# Altium PCB MSP430_Board.PcbDoc
Units mil, origin at the board's own origin, x right, y up, seen from the top; angles counter-clockwise.
Board outline 8230 x 4250 mil, 2 copper layers (Top Layer, Bottom Layer); 50 components, 122 nets, 371 pads, 42 vias.
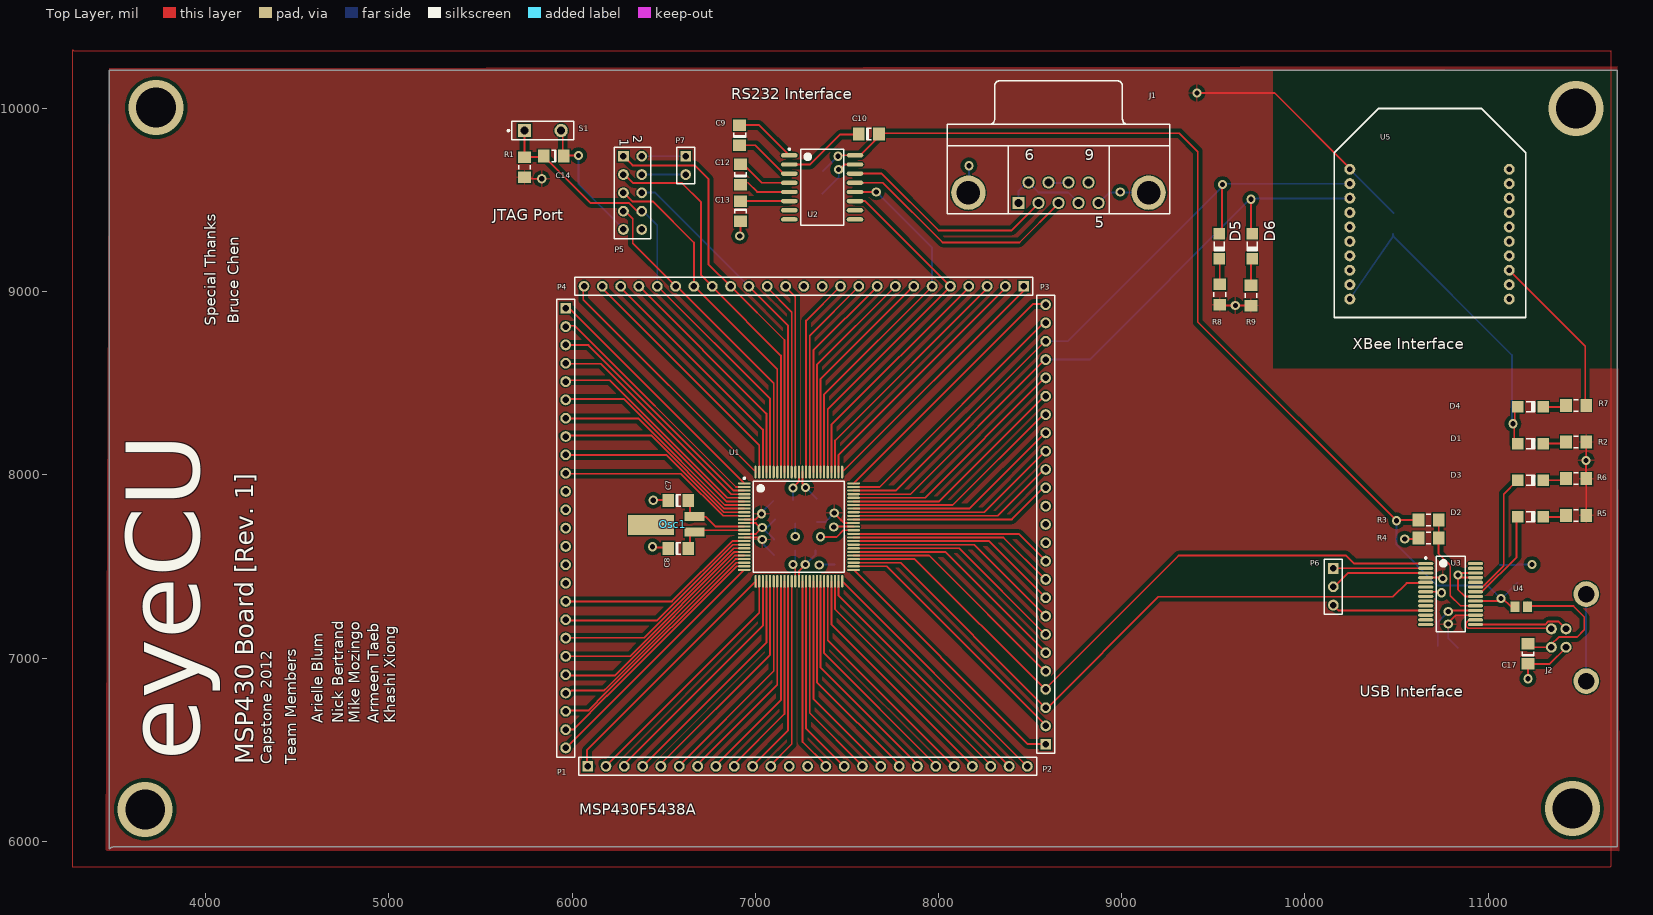
[diagram p0: Top Layer view]
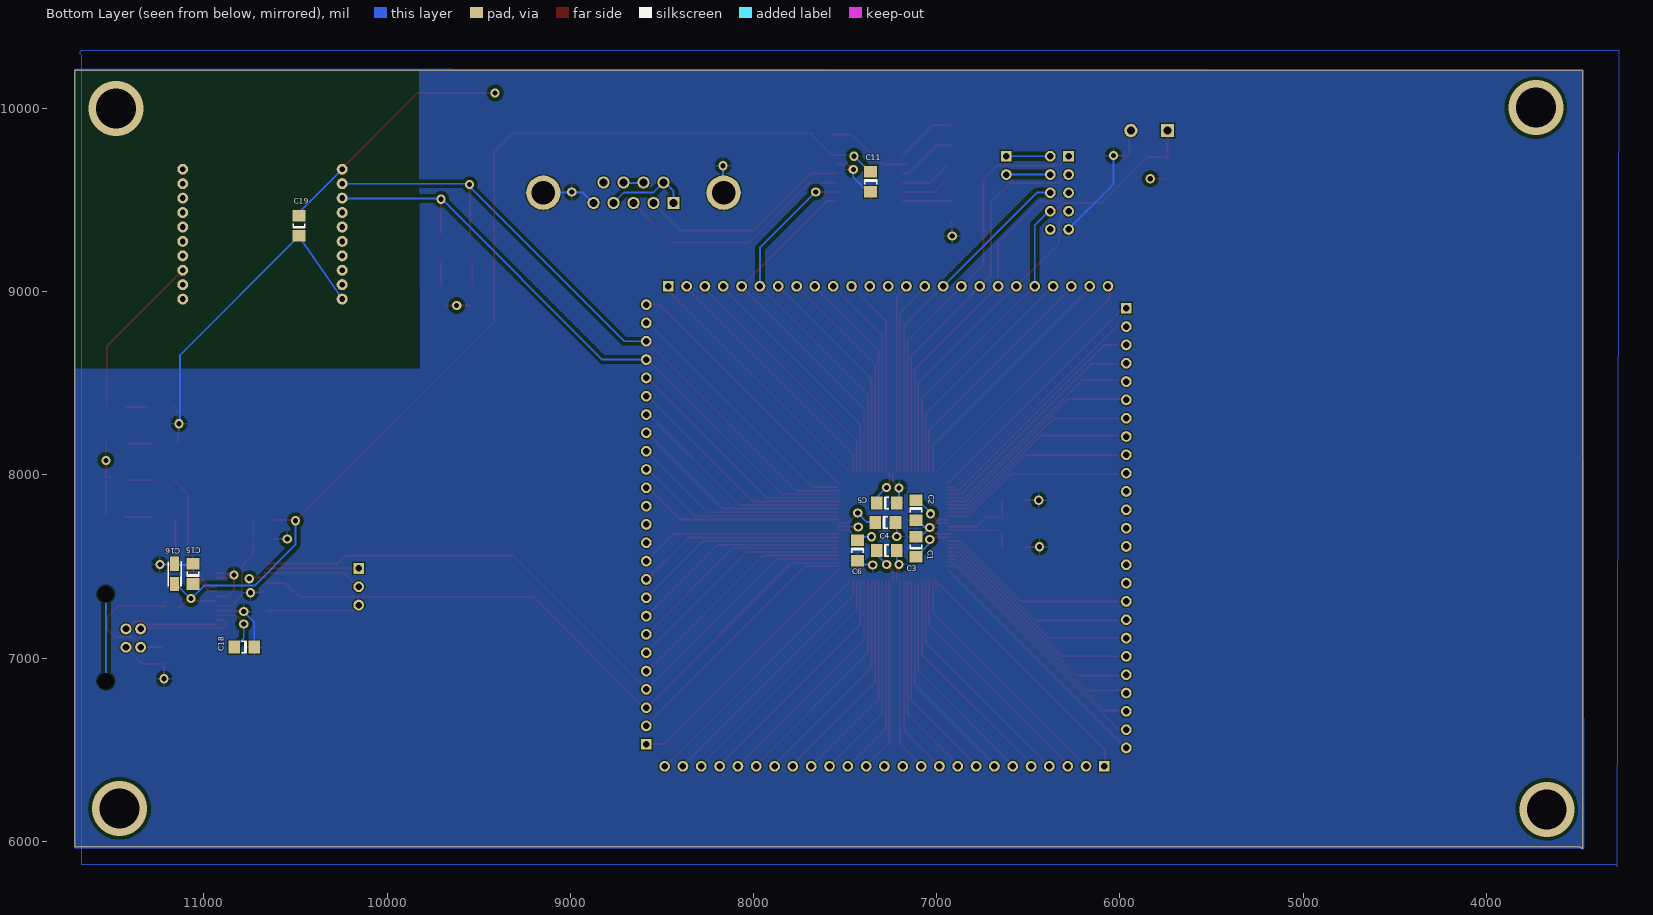
[diagram p1: Bottom Layer view, seen from below]

## Layer stack, top to bottom
Top Layer: signal copper 1.4
Dielectric: dielectric 12.6, FR-4, Dk 4.8
Bottom Layer: signal copper 1.4

## Board outline
3475,10210 11705,10210 11705,5970 3499.14,5970 ccw(c3499.14,5935.86) 3475,5960 3475,10200

## Design rules (kind name [scope] priority, off if disabled: settings)
Clearance Polygon_Clearance [InPolygon vs IsTrack OR IsVia] p1: gap=20 // clearance from other pours to connectors
Clearance [All] p2: gap=6
DiffPairsRouting [All] p1: maxlimit=10 minlimit=10 mostfreqgap=10 maxuncoupledlength=500
HoleSize [All] p1: absolutevalues=TRUE maxlimit=300 minlimit=15 maxpercent=80.000 minpercent=20.000
MinimumAnnularRing [All] p1: minimumring=7
MinimumSolderMaskSliver [All] p1: minsoldermaskwidth=6
PolygonConnect [All] p1: connectstyle=Relief reliefconductorwidth=10 reliefentries=4 polygonreliefangle="90 Angle"
RoutingVias [All] p1: holewidth=28 width=50 viastyle="Through Hole" minholewidth=28 minwidth=50 maxholewidth=28 maxwidth=50
SilkscreenOverComponentPads [All] p1: minsilkscreentomaskgap=6
SolderMaskExpansion [All] p1: expansion=4
Width [All] p1: maxlimit=10 minlimit=6 preferedwidth=10 bottomlayer_minwidth=10 minimp=50.000000 maximp=50.000000 favimp=50.000000
24 further rules are at their usual default settings.

## Classes and differential pairs
net class U5_Nets: MSP_AVCC MSP_AVSS MSP_P9.4/UCA2TXD MSP_P9.5/UCA2RXD NetR7_2 NetU5_4 NetU5_5 NetU5_6 NetU5_7 NetU5_8 NetU5_9 NetU5_11 NetU5_12 NetU5_14 NetU5_15 NetU5_16 NetU5_17 NetU5_18 NetU5_19 NetU5_20
net class J2_Nets: MSP_AVSS NetC17_2 USB_SHIELD USBD_N USBD_P
net class U3_Nets: C\T\S\ D\T\R\ MSP_AVCC MSP_AVSS MSP_P5.6/UCA1TXD MSP_P5.7/UCA1RXD R\E\S\E\T\ R\T\S\ USB_RX USB_TX USBD_N USBD_P VCC5V
net class R9_Nets: MSP_AVCC NetD6_1
net class R8_Nets: MSP_AVCC NetD5_1
net class R6_Nets: MSP_AVCC NetD3_1
net class R5_Nets: MSP_AVCC NetD2_1
net class R2_Nets: MSP_AVCC NetD1_1
net class R1_Nets: MSP_AVCC MSP_R\S\T\
net class C19_Nets: MSP_AVCC MSP_AVSS
net class C18_Nets: MSP_AVCC MSP_AVSS
net class C5_Nets: MSP_AVCC MSP_AVSS
net class C4_Nets: MSP_AVCC MSP_AVSS
net class C3_Nets: MSP_AVCC MSP_AVSS
net class C2_Nets: MSP_AVCC MSP_AVSS
net class C1_Nets: MSP_AVCC MSP_AVSS
net class P7_Nets: VCCTARGET VCCTOOL
net class R7_Nets: NetD4_1 NetR7_2
component class Serial_and_JTAG: C9 C10 C11 C12 C13 C14 J1 P5 P7 R1 S1 U2
component class Sheet1: C1 C2 C3 C4 C5 C6 C7 C8 Osc1 P1 P2 P3 P4 U1
component class "USB Interface": C15 C16 C17 C18 D1 D2 D3 J2 LED1 LED2 LED3 P6 R2 R3 R4 R5 R6 U3 U4
component class XBee: C19 D4 D5 D6 LED4 LED5 LED6 R7 R8 R9 U5
net class C6_Nets: MSP_AVSS MSP_VCORE
net class C11_Nets: MSP_AVSS VCC5V
net class C14_Nets: MSP_AVSS MSP_R\S\T\
net class C16_Nets: MSP_AVSS VCC5V
net class C15_Nets: MSP_AVSS VCC5V
net class J1_Nets: MSP_AVSS NetJ1_1 NetJ1_7 NetJ1_9 RS232_RX RS232_TX
net class P1_Nets: MSP_P1.0//TA0CLK/ACLK MSP_P1.1/TA0.0 MSP_P1.2/TA0.1 MSP_P1.3/TA0.2 MSP_P1.4/TA0.3 MSP_P1.5/TA0.4 MSP_P1.6/SMCLK MSP_P1.7 MSP_P2.0/TA1CLK MSP_P5.0/VREF+ MSP_P5.1/VREF- MSP_P6.4/A4 MSP_P6.5/A5 MSP_P6.6/A6 MSP_P6.7/A7 MSP_P7.4/A12 MSP_P7.5/A13 MSP_P7.6/A14 MSP_P7.7/A15
net class P2_Nets: MSP_P2.1/TA1.0 MSP_P2.2/TA1.1 MSP_P2.3/TA1.2 MSP_P2.4/RTCCLK MSP_P2.5 MSP_P2.6/ACLK MSP_P2.7/DMAE0 MSP_P3.0/UCA0CLK MSP_P3.1/UCB0SDA MSP_P3.2/UCB0SCL MSP_P3.3/UCA0STE MSP_P3.4/UCA0TXD MSP_P3.5/UCA0RXD MSP_P3.6/UCA1CLK MSP_P3.7/UCB1SDA MSP_P4.0/TB0.0 MSP_P4.1/TB0.1 MSP_P4.2/TB0.2 MSP_P4.3/TB0.3 MSP_P4.4/TB0.4 MSP_P4.5/TB0.5 MSP_P4.6/TB0.6 MSP_P4.7/TB0CLK/SMCLK
net class P3_Nets: MSP_P5.4/UCB1SCL MSP_P5.5/UCB1CLK MSP_P5.6/UCA1TXD MSP_P5.7/UCA1RXD MSP_P7.2 MSP_P7.3/TA1.2 MSP_P8.0/TA0.0 MSP_P8.1/TA0.1 MSP_P8.2/TA0.2 MSP_P8.3/TA0.3 MSP_P8.4/TA0.4 MSP_P8.5/TA1.0 MSP_P8.6/TA1.1 MSP_P8.7 MSP_P9.0 MSP_P9.1 MSP_P9.2 MSP_P9.3 MSP_P9.4/UCA2TXD MSP_P9.5/UCA2RXD MSP_P9.6 MSP_P9.7
net class P4_Nets: MSP_P5.2/XT2IN MSP_P5.3/XT2OUT MSP_P6.0/A0 MSP_P6.1/A1 MSP_P6.2/A2 MSP_P6.3/A3 MSP_P10.0 MSP_P10.1 MSP_P10.2 MSP_P10.3 MSP_P10.4/UCA3TXD MSP_P10.5/UCA3RXD MSP_P10.6 MSP_P10.7 MSP_P11.0/ACLK MSP_P11.1/MCLK MSP_P11.2/SMCLK MSP_PJ.0/TDO MSP_PJ.1/TDI/TCLK MSP_PJ.2/TMS MSP_PJ.3/TCK MSP_R\S\T\ MSP_TEST
net class P5_Nets: MSP_AVSS MSP_PJ.0/TDO MSP_PJ.1/TDI/TCLK MSP_PJ.2/TMS MSP_PJ.3/TCK MSP_R\S\T\ MSP_TEST NetP6_10 VCCTARGET VCCTOOL
net class U1_Nets: MSP_AVCC MSP_AVSS MSP_P1.0//TA0CLK/ACLK MSP_P1.1/TA0.0 MSP_P1.2/TA0.1 MSP_P1.3/TA0.2 MSP_P1.4/TA0.3 MSP_P1.5/TA0.4 MSP_P1.6/SMCLK MSP_P1.7 MSP_P2.0/TA1CLK MSP_P2.1/TA1.0 MSP_P2.2/TA1.1 MSP_P2.3/TA1.2 MSP_P2.4/RTCCLK MSP_P2.5 MSP_P2.6/ACLK MSP_P2.7/DMAE0 MSP_P3.0/UCA0CLK MSP_P3.1/UCB0SDA MSP_P3.2/UCB0SCL MSP_P3.3/UCA0STE MSP_P3.4/UCA0TXD MSP_P3.5/UCA0RXD MSP_P3.6/UCA1CLK MSP_P3.7/UCB1SDA MSP_P4.0/TB0.0 MSP_P4.1/TB0.1 MSP_P4.2/TB0.2 MSP_P4.3/TB0.3 MSP_P4.4/TB0.4 MSP_P4.5/TB0.5 MSP_P4.6/TB0.6 MSP_P4.7/TB0CLK/SMCLK MSP_P5.0/VREF+ MSP_P5.1/VREF- MSP_P5.2/XT2IN MSP_P5.3/XT2OUT MSP_P5.4/UCB1SCL MSP_P5.5/UCB1CLK MSP_P5.6/UCA1TXD MSP_P5.7/UCA1RXD MSP_P6.0/A0 MSP_P6.1/A1 MSP_P6.2/A2 MSP_P6.3/A3 MSP_P6.4/A4 MSP_P6.5/A5 MSP_P6.6/A6 MSP_P6.7/A7 MSP_P7.0/XIN MSP_P7.1/XOUT MSP_P7.2 MSP_P7.3/TA1.2 MSP_P7.4/A12 MSP_P7.5/A13 MSP_P7.6/A14 MSP_P7.7/A15 MSP_P8.0/TA0.0 MSP_P8.1/TA0.1 MSP_P8.2/TA0.2 MSP_P8.3/TA0.3 MSP_P8.4/TA0.4 MSP_P8.5/TA1.0 MSP_P8.6/TA1.1 MSP_P8.7 MSP_P9.0 MSP_P9.1 MSP_P9.2 MSP_P9.3 MSP_P9.4/UCA2TXD MSP_P9.5/UCA2RXD MSP_P9.6 MSP_P9.7 MSP_P10.0 MSP_P10.1 MSP_P10.2 MSP_P10.3 MSP_P10.4/UCA3TXD MSP_P10.5/UCA3RXD MSP_P10.6 MSP_P10.7 MSP_P11.0/ACLK MSP_P11.1/MCLK MSP_P11.2/SMCLK MSP_PJ.0/TDO MSP_PJ.1/TDI/TCLK MSP_PJ.2/TMS MSP_PJ.3/TCK MSP_R\S\T\ MSP_TEST MSP_VCORE NetU1_39 NetU1_40 NetU1_53 NetU1_54 NetU1_57 NetU1_58 NetU1_59 NetU1_60 NetU1_61 NetU1_62 NetU1_65 NetU1_66 NetU1_67 NetU1_68 NetU1_69 NetU1_70 NetU1_71 NetU1_72 NetU1_73 NetU1_74 NetU1_75 NetU1_76 NetU1_77 NetU1_78 NetU1_79 NetU1_80 NetU1_81 NetU1_82 NetU1_83 NetU1_84 NetU1_85 NetU1_86 NetU1_89 NetU1_90 NetU1_91 NetU1_92 NetU1_93 NetU1_94 NetU1_95 NetU1_96
net class U2_Nets: MSP_AVSS MSP_P10.4/UCA3TXD MSP_P10.5/UCA3RXD NetC9_1 NetC9_2 NetC10_1 NetC12_1 NetC12_2 NetC13_1 NetU2_7 NetU2_8 NetU2_9 NetU2_10 RS232_RX RS232_TX VCC5V
net class U4_Nets: NetC17_2 VCC5V
net class P6_Nets: C\T\S\ D\T\R\ R\T\S\
net class R3_Nets: R\E\S\E\T\ VCC5V
net class R4_Nets: MSP_AVSS R\E\S\E\T\
net class C7_Nets: MSP_AVSS MSP_P7.0/XIN
net class C8_Nets: MSP_AVSS MSP_P7.1/XOUT
net class S1_Nets: MSP_AVSS MSP_R\S\T\
net class Osc1_Nets: MSP_P7.0/XIN MSP_P7.1/XOUT
net class C9_Nets: NetC9_1 NetC9_2
net class C12_Nets: NetC12_1 NetC12_2
net class C13_Nets: MSP_AVSS NetC13_1
net class C17_Nets: MSP_AVSS NetC17_2
net class C10_Nets: NetC10_1 VCC5V
net class D6_Nets: MSP_P9.4/UCA2TXD NetD6_1
net class D5_Nets: MSP_P9.5/UCA2RXD NetD5_1
net class D4_Nets: MSP_AVSS NetD4_1
net class D3_Nets: NetD3_1 USB_TX
net class D2_Nets: NetD2_1 USB_RX
net class D1_Nets: MSP_AVSS NetD1_1
differential pair USBD: +USBD_P -USBD_N

## Components (designator, comment, footprint, x,y, rotation, side; value= is the part's Value field where it differs from the comment)
C1 "C1206" 1206 7113,7808 r270 bottom
C2 "C1206" 1206 7113,7608 r90 bottom
C3 "C1206" 1206 7273,7588 r180 bottom
C4 "C1206" 1206 7280,7740 r180 bottom
C5 "C1206" 1206 7273,7848 r180 bottom
C6 "C1206" 1206 7433,7588 r270 bottom
C7 "C1206" 1206 6580,7860 r0 top
C8 "C1206" 1206 6580,7600 r0 top
C9 "C1206" 1206 6915,9855 r90 top
C10 "C1206" 1206 7620,9860 r0 top
C11 "C1206" 1206 7360,9600 r270 bottom
C12 "C1206" 1206 6920,9640 r90 top
C13 "C1206" 1206 6920,9440 r270 top
C14 "C1206" 1206 5900,9740 r180 top
C15 "C1206" 1206 11060,7460 r90 bottom
C16 "T494A" A 11160,7460 r90 bottom
C17 "C1206" 1206 11217,7024 r90 top
C18 "C1206" 1206 10780,7060 r0 bottom
C19 "C1206" 1206 10480,9360 r90 bottom
D1 "LED2" LED_LiteOn_footprint 11300,8140 r180 top
D2 "LED2" LED_LiteOn_footprint 11300,7740 r180 top
D3 "LED2" LED_LiteOn_footprint 11300,7940 r180 top
D4 "LED2" LED_LiteOn_footprint 11300,8340 r180 top
D5 "LED2" LED_LiteOn_footprint 9500,9180 r90 top
D6 "LED2" LED_LiteOn_footprint 9680,9180 r90 top
J1 "D Connector 9" DSUB1.385-2H9 8655,9915 r0 top
J2 "USBB" PCBComponent_1#1 11535,7350 r90 top
Osc1 "crystal" PCBCOMPONENT_1 6608,7659 r0 top
P1 "Header 25" HDR1X25 5965,8910 r270 top
P2 "Header 25" HDR1X25 6085,6410 r0 top
P3 "Header 25" HDR1X25 8585,6530 r90 top
P4 "Header 25" HDR1X25 8465,9030 r180 top
P5 "JTAG" HDR2X5 6280,9740 r270 top
P6 "Header 3" HDR1X3 10155,7490 r270 top
P7 "Header 2" HDR1X2 6620,9740 r270 top
R1 "47K" 8-1206 5740,9680 r270 top
R2 "100" 8-1206 11480,8180 r0 top
R3 "4.7K" 8-1206 10675,7755 r0 top
R4 "10K" 8-1206 10675,7655 r180 top
R5 "100" 8-1206 11480,7780 r180 top
R6 "100" 8-1206 11480,7980 r180 top
R7 "100" 8-1206 11480,8380 r0 top
R8 "100" 8-1206 9535,8985 r90 top
R9 "100" 8-1206 9705,8980 r90 top
S1 "SW-PB" SPST-2 5840,9880 r0 top
U1 "MSP430" TSQFP50P1600X1600X160-100N 7238,7718 r0 top
U2 "MAX232CWE" WSO16_N 7365,9570 r0 top
U3 "FT232RL" SOP65P780X200-28N 10795,7350 r0 top
U4 "MI0805K400R-10" INDC2012X11N 11180,7280 r180 top
U5 "XBee" PCBComponent_1#2 10245,8960 r0 top

## Footprints (in the part's own frame and the unit in brackets; to place one, negate y for a bottom-side part, rotate by r counter-clockwise, add the part's x,y. Pads: shape width x height; smd on the part's side, far side on the other; paste and mask are expansions set on the pad)
8-1206 [mm] "Chip Resistor; Body 3.1 x 1.6 mm (LxW typ)"
  rect 1.6x1.8 smd: 1(-1.4,0) 2(1.4,0)
  silkscreen extent -0.3,-0.8 0.3,0.8
1206 [mm] "Chip Capacitor; Body 3.2 x 1.6 mm (LxW typ)"
  rect 1.6x1.8 smd: 1(-1.4,0) 2(1.4,0)
  silkscreen extent -0.3,-0.8 0.3,0.8
A [mm] "Capacitor, SM Tantalum; Body 3.2 x 1.6 mm (LxW typ)"
  rect 2x1.2 smd: 1(-1.4,0) 2(1.4,0)
  silkscreen extent -1.7,-0.9 1.7,0.9
DSUB1.385-2H9 [mm] "Connector; D Subminiature; 9 Position; Right Angle; Pitch 1.385 mm"
  rect 1.69x1.69 hole 1.09: 1(-5.54,-10.92)
  round 1.69 hole 1.09: 2(-2.77,-10.92) 3(0,-10.92) 4(2.77,-10.92) 5(5.54,-10.92) 6(-4.155,-8.08) 7(-1.385,-8.08) 8(1.385,-8.08) 9(4.155,-8.08)
  round 4.76 hole 3.26: 10(-12.495,-9.5) 11(12.495,-9.5)
  silkscreen extent -15.4,-12.4 15.4,6
HDR1X2 [mm] "Connector; Header; 2 Position"
  rect 1.5x1.5 hole 0.9: 1(0,0)
  round 1.5 hole 0.9: 2(2.54,0)
  silkscreen extent -1.27,-1.27 3.81,1.27
HDR1X3 [mm] "Connector; Header; 3 Position"
  rect 1.5x1.5 hole 0.9: 1(0,0)
  round 1.5 hole 0.9: 2(2.54,0) 3(5.08,0)
  silkscreen extent -1.27,-1.27 6.35,1.27
HDR1X25 [mm] "Connector; Header; 25 Position"
  rect 1.5x1.5 hole 0.9: 1(0,0)
  round 1.5 hole 0.9: 2(2.54,0) 3(5.08,0) 4(7.62,0) 5(10.16,0) 6(12.7,0) 7(15.24,0) 8(17.78,0) 9(20.32,0) 10(22.86,0) 11(25.4,0) 12(27.94,0) 13(30.48,0) 14(33.02,0) 15(35.56,0) 16(38.1,0) 17(40.64,0) 18(43.18,0) 19(45.72,0) 20(48.26,0) 21(50.8,0) 22(53.34,0) 23(55.88,0) 24(58.42,0) 25(60.96,0)
  silkscreen extent -1.27,-1.27 62.23,1.27
HDR2X5 [mm] "Connector; Header; 5x2 Position"
  rect 1.5x1.5 hole 0.9: 1(0,0)
  round 1.5 hole 0.9: 2(0,2.54) 3(2.54,0) 4(2.54,2.54) 5(5.08,0) 6(5.08,2.54) 7(7.62,0) 8(7.62,2.54) 9(10.16,0) 10(10.16,2.54)
  silkscreen extent -1.27,-1.27 11.43,3.81
INDC2012X11N [mm] "Chip Inductor, 2-Leads, Body 2.0x1.3mm, IPC Medium Density"
  rect 1.25x1.45 smd: 1(-0.875,0) 2(0.875,0)
  body extent -1.1,-0.72 1.1,0.72, height 1.1
LED_LiteOn_footprint [mm] "LED Lite On foot print SMD 1206"
  rect 1.6x1.6 smd: 1(0,-0.8) 2(3.5,-0.8)
  silkscreen extent 1.15,-1.5 2.35,-0.1, body extent -0.82,-1.63 4.33,0.03, height 1.1
PCBComponent_1#1 [mil]
  round 60 / inner round 0 / far side round 60 hole 36.3: 1(-290,190) 2(-190,190) 3(-190,110) 4(-290,110)
  round 140 / inner round 0 / far side round 0 hole 90.6 paste+0: 5(-475,0)
  round 140 / inner round 0 / far side round 0 hole 90.6: 6(0,0)
PCBComponent_1#2 [mil]
  round 60 hole 31.5: 1(0,708.66) 2(0,629.92) 3(0,551.18) 4(0,472.44) 5(0,393.7) 6(0,314.96) 7(0,236.22) 8(0,157.48) 9(0,78.74) 10(0,0) 11(870,0) 12(870,78.74) 13(870,157.48) 14(870,236.22) 15(870,314.96) 16(870,393.7) 17(870,472.44) 18(870,551.18) 19(870,629.92) 20(870,708.66)
  silkscreen extent -85,-100 960,1040
PCBCOMPONENT_1 [mil]
  rect 110x50 smd: 1(60,30) 2(60,114.06)
  rect 250x110 smd: M1(-177.17,68.9)
SOP65P780X200-28N [mm] "SOP, 28-Leads, Body 10.5x5.6mm (max), Pitch 0.65mm, IPC Medium Density"
  oval 2.1x0.45 smd: 1(-3.45,4.225) 2(-3.45,3.575) 3(-3.45,2.925) 4(-3.45,2.275) 5(-3.45,1.625) 6(-3.45,0.975) 7(-3.45,0.325) 8(-3.45,-0.325) 9(-3.45,-0.975) 10(-3.45,-1.625) 11(-3.45,-2.275) 12(-3.45,-2.925) 13(-3.45,-3.575) 14(-3.45,-4.225) 15(3.45,-4.225) 16(3.45,-3.575) 17(3.45,-2.925) 18(3.45,-2.275) 19(3.45,-1.625) 20(3.45,-0.975) 21(3.45,-0.325) 22(3.45,0.325) 23(3.45,0.975) 24(3.45,1.625) 25(3.45,2.275) 26(3.45,2.925) 27(3.45,3.575) 28(3.45,4.225)
  silkscreen extent -3.57,-5.25 2,5.25, body extent -2.8,-5.25 2.8,5.25, height 2
SPST-2 [mm] "Circuit Breaker; 2 Leads"
  rect 1.85x1.85 hole 1.1: 1(-2.54,0)
  round 1.85 hole 1.1: 2(2.54,0)
  silkscreen extent -4.89,-1.27 4.28,1.27
TSQFP50P1600X1600X160-100N [mm] "TSQFP, 100-Leads, Body 16.2x16.2mm (max), Pitch 0.50mm, IPC Medium Density"
  oval 1.75x0.3 smd: 1(-7.575,6) 2(-7.575,5.5) 3(-7.575,5) 4(-7.575,4.5) 5(-7.575,4) 6(-7.575,3.5) 7(-7.575,3) 8(-7.575,2.5) 9(-7.575,2) 10(-7.575,1.5) 11(-7.575,1) 12(-7.575,0.5) 13(-7.575,0) 14(-7.575,-0.5) 15(-7.575,-1) 16(-7.575,-1.5) 17(-7.575,-2) 18(-7.575,-2.5) 19(-7.575,-3) 20(-7.575,-3.5) 21(-7.575,-4) 22(-7.575,-4.5) 23(-7.575,-5) 24(-7.575,-5.5) 25(-7.575,-6) 51(7.575,-6) 52(7.575,-5.5) 53(7.575,-5) 54(7.575,-4.5) 55(7.575,-4) 56(7.575,-3.5) 57(7.575,-3) 58(7.575,-2.5) 59(7.575,-2) 60(7.575,-1.5) 61(7.575,-1) 62(7.575,-0.5) 63(7.575,0) 64(7.575,0.5) 65(7.575,1) 66(7.575,1.5) 67(7.575,2) 68(7.575,2.5) 69(7.575,3) 70(7.575,3.5) 71(7.575,4) 72(7.575,4.5) 73(7.575,5) 74(7.575,5.5) 75(7.575,6)
  oval 0.3x1.75 smd: 26(-6,-7.575) 27(-5.5,-7.575) 28(-5,-7.575) 29(-4.5,-7.575) 30(-4,-7.575) 31(-3.5,-7.575) 32(-3,-7.575) 33(-2.5,-7.575) 34(-2,-7.575) 35(-1.5,-7.575) 36(-1,-7.575) 37(-0.5,-7.575) 38(0,-7.575) 39(0.5,-7.575) 40(1,-7.575) 41(1.5,-7.575) 42(2,-7.575) 43(2.5,-7.575) 44(3,-7.575) 45(3.5,-7.575) 46(4,-7.575) 47(4.5,-7.575) 48(5,-7.575) 49(5.5,-7.575) 50(6,-7.575) 76(6,7.575) 77(5.5,7.575) 78(5,7.575) 79(4.5,7.575) 80(4,7.575) 81(3.5,7.575) 82(3,7.575) 83(2.5,7.575) 84(2,7.575) 85(1.5,7.575) 86(1,7.575) 87(0.5,7.575) 88(0,7.575) 89(-0.5,7.575) 90(-1,7.575) 91(-1.5,7.575) 92(-2,7.575) 93(-2.5,7.575) 94(-3,7.575) 95(-3.5,7.575) 96(-4,7.575) 97(-4.5,7.575) 98(-5,7.575) 99(-5.5,7.575) 100(-6,7.575)
  silkscreen extent -7.7,-6.3 6.3,6.82, body extent -7,-7 7,7, height 1.6
WSO16_N [mm] "SOIC, 16-Leads, Body 10.3x7.5mm, Pitch 1.27mm, IPC Medium Density"
  oval 2.3x0.6 smd: 1(-4.55,4.445) 2(-4.55,3.175) 3(-4.55,1.905) 4(-4.55,0.635) 5(-4.55,-0.635) 6(-4.55,-1.905) 7(-4.55,-3.175) 8(-4.55,-4.445) 9(4.55,-4.445) 10(4.55,-3.175) 11(4.55,-1.905) 12(4.55,-0.635) 13(4.55,0.635) 14(4.55,1.905) 15(4.55,3.175) 16(4.55,4.445)
  silkscreen extent -4.67,-5.25 3,5.42, body extent -3.75,-5.25 3.75,5.25, height 2.65

## Part data
C1 C2 C3 C4 C5 C6 C7 C8 C9 C10 C11 C12 C13 C14 C15 C17 C18 C19: "Ceramic Chip Capacitor - Standard"
C16: "Solid Tantalum Chip Capacitor, Standard T494 Series - Low ESR, Industrial Grade"
D1 D2 D3 D4 D5 D6: "Typical RED, GREEN, YELLOW, AMBER GaAs LED"
J1: "Receptacle Assembly, 9 Position, Right Angle"
P1 P2 P3 P4: "Header, 25-Pin"
P5: library part "Header 5X2", "Header, 5-Pin, Dual row"
P6: "Header, 3-Pin"
P7: "Header, 2-Pin"
R1: library part ERJ8EN, "Precision Thick Film Chip Resistor, 10 Ohm to 2.2M Ohm Range, 1% Tolerance, 1206 Size, 0.125 W"
R2 R3 R4 R5 R6 R7 R8 R9: library part ERJ8GE, "Thick Film Chip Resistor, 1 Ohm to 10M Ohm Range, 5% Tolerance, 1206 Size, 0.25 W"
S1: "Switch"
U2: "+5V Powered RS-232 Driver/Receiver"
U4: library part "ferrite bead", "ferrite bead"

## Via types
v1: diameter 50, hole 28, Top Layer to Bottom Layer, 38 vias
v2: diameter 300, hole 218, Top Layer to Bottom Layer, 4 vias

## Nets (pads, with @x,y where several pads share a name; then routed paths per layer and width w, separated by ;. In a path a pad name is that pad's centre, name@x,y a point inside that pad or via, vN(x,y) a via of type N, cw(c..) or ccw(c..) an arc to the next point about the centre after c; other vN are vias at no path point)
C\T\S\: P6.3 U3.11 | length 509.7
  Top Layer w10: P6.3@10160,7285 10185,7260 10470,7260 10470.43,7260.43 U3.11
D\T\R\: P6.1 U3.2 | length 493.4
  Top Layer w10: P6.1@10165.75,7490.75 U3.2
MSP_AVCC: C1.1 C2.1 C3.1 C4.1 C5.1 C18.2 C19.2 R1.2 R2.2 R5.1 R6.1 R8.1 R9.1 U1.11 U1.16 U1.38 U1.64 U1.87 U3.4 U3.17 U5.1 | length 3453.2
  Top Layer w10: R1.2@5748,9617 v1(5834,9617) ; U1.16 v1@7027.06,7658.94 ; U1.11 7002.37,7757.37 v1(7033,7788) v1@7038,7793 ; U1.38@7238,7433 U1.38 7238,7475 v1@7278,7515 ; v1@7257.69,7950.31 U1.87 ; v1@7432,7792 7486.31,7737.69 U1.64 ; v1(9410,10085) 9420,10085 9835,10085 U5.1@10245,9675 ; R8.1@9550,8924.88 R9.1@9680.12,8924.88 ; U3.4 v1@10748.43,7439.57 ; v1@10782,7193 10823.84,7234.84 U3.17 ; U3.17@10892.84,7234.84 U3.17 ; U3.17@10932.67,7233 U3.17 ; R6.1@11515.12,7985 R6.1@11515.12,7994.88 ; R6.1@11535,7985 v1(11535,8080) ; R5.1 R6.1@11535.12,7970.12 ; v1@11535.12,8075.12 R2.2
  Bottom Layer w10: v1(7033,7788) 7033,7793 C1.1@7098,7858 ; v1@7053,7648 v1(7038,7648) 7038,7628 C2.1@7103,7563 ; v1@7272,7509 7328.12,7565.12 C3.1 ; v1(7274,7932) C5.1@7335,7871 ; C4.1@7336,7743 7381,7743 v1(7431,7793) ; U5.1 C19.2@10485,9428.66 ; v1(10782,7186) 10782,7110 C18.2@10835,7057
  other v1: 10752,7434 7273,7511 9620,8925
MSP_AVSS: C1.2 C2.2 C3.2 C4.2 C5.2 C6.2 C7.1 C8.1 C11.2 C13.2 C14.1 C15.2 C16.2 C17.1 C18.1 C19.1 D1.2 D4.2 J1.5 J1.10 J1.11 J2.4 P5.9 R4.2 S1.2 U1.12 U1.15 U1.37 U1.63 U1.88 U2.15 U3.7 U3.18 U3.21 U3.25 U3.26 U5.10 | length 6016.8
  Top Layer w10: C14.1@5949,9741 S1.2@5949,9867 ; C14.1@5956,9743 v1(6035,9743) ; v1@6439,7605 C8.1@6528.88,7605 ; v1@6443,7864 C7.1@6527.88,7864 ; U1.15@6913,7678 6912.37,7678.63 U1.15 7003.63,7678.63 v1@7028,7703 ; v1@6920,9310 C13.2 ; U1.15@6933,7678 U1.15@6968,7678 ; U1.12 7003.31,7737.69 v1@7033,7708 ; v1@7206,7932 7238,7964 U1.88 ; U1.37 v1@7218.31,7493.69 ; v1@7435,7718 U1.63 U1.63@7537.23,7719 ; v1@7459,9666 7488,9695 U2.15 ; v1(10545,7650) R4.2@10620,7650 ; U3.7 v1@10737.2,7362.8 ; v1@10790.43,7260.43 U3.18 ; v1@10835,7460 v1@10839.72,7460.25 ; v1@10840,7455 v1@10840,7450 ; v1@10840.16,7465.16 U3.26 ; U3.21@10928.03,7340 U3.21 10872.8,7337.2 10835,7375 v1(10835,7455) v1@10840,7450 ; U3.25 10850.43,7439.57 v1@10840,7450 ; D1.2@11142.2,8171.5 v1@11142.2,8287.8 ; v1@11145,8290 11145,8354.29 D4.2 ; v1(11217,6888) C17.1@11217,6962 ; C17.1 11335.88,6968.88 J2.4@11425,7058
  Bottom Layer w10: v1(6035,9743) 6035,9588 P5.9@6279,9344 ; C2.2@7102.5,7648.5 v1(7038,7713) 7063,7713 C1.2@7108,7758 ; C5.2@7205,7864 v1(7205,7929) ; v1@7217.88,7516.88 C3.2 ; v1(7218,7664) C4.2@7218,7737 ; v1@7351,7517 7353,7517 7359,7511 C6.2@7434,7511 ; C11.2@7366,9536 7455,9625 v1(7455,9667) v1@7455,9649 ; J1.10@8101.02,9540.98 J1.10 ; J1.10@8166,9582 v1(8166,9688) ; J1.5@8880,9490 8930.98,9540.98 J1.11 ; U5.10 C19.1@10480,9300 ; C19.1@10480,9315 C19.1@10480,9305 ; C19.1@10485,9305 C19.1@10480,9305 ; C18.1@10725,7066 10725,7197 v1(10782,7254) ; C15.2@11063,7509 11158,7509 11160,7511 v1(11240,7511) ; v1@11130,8300 11130,8654.88 C19.1 C19.1@10480,9305
  other v1: 10745,7357 7349,7509 7205,7512 6439,7608 7428,7717 6443,7862 11135,8280 6915,9305 8992,9544
MSP_P1.0//TA0CLK/ACLK: P1.17 U1.17 | length 1109.2
  Top Layer w10: P1.17@5967,7310 6545,7310 6874.26,7639.26 U1.17
MSP_P1.1/TA0.0: P1.18 U1.18 | length 1138.1
  Top Layer w10: P1.18@5973,7206 6464.37,7206 6877.95,7619.57 U1.18
MSP_P1.2/TA0.1: P1.19 U1.19 | length 1171.9
  Top Layer w10: P1.19@5970,7112 6393,7112 6867.83,7586.83 6868.2,7586.83 6881.26,7599.89 U1.19
MSP_P1.3/TA0.2: P1.20 U1.20 | length 1203.4
  Top Layer w10: P1.20@5970,7011 6316.75,7011 6883.17,7577.43 ; 6884.2,7580.2 U1.20
MSP_P1.4/TA0.3: P1.21 U1.21 | length 1247.3
  Top Layer w10: P1.21@5964,6905 6233.37,6905 6888.89,7560.52 U1.21
MSP_P1.5/TA0.4: P1.22 U1.22 | length 1274.5
  Top Layer w10: P1.22@5973,6798 5999,6824 6174.75,6824 6179.75,6829 6180,6829 6891.83,7540.83 U1.22
MSP_P1.6/SMCLK: P1.23 U1.23 | length 1307.9
  Top Layer w10: P1.23@5967,6712 5969,6714 6087.37,6714 6186.37,6813 6186.63,6813 6894.78,7521.15 U1.23
MSP_P1.7: P1.24 U1.24 | length 1350.8
  Top Layer w10: P1.24 6006,6610 6193,6797 ; 6188.25,6792 6897.72,7501.46 U1.24
MSP_P2.0/TA1CLK: P1.25 U1.25 | length 1362.6
  Top Layer w10: P1.25 P1.25@5966.02,6510 ; P1.25@5976.99,6519 U1.25
MSP_P2.1/TA1.0: P2.1 U1.26 | length 1443.7
  Top Layer w10: P2.1@6082,6421 6082,6499.99 U1.26 ; P2.1 P2.1@6103.94,6410 ; U1.26@7003,7388 U1.26@7003,7433
MSP_P2.2/TA1.1: P2.2 U1.27 | length 1374
  Top Layer w10: P2.2@6170,6425 P2.2 ; P2.2@6186,6413 7021.46,7248.46 U1.27
MSP_P2.3/TA1.2: P2.3 U1.28 | length 1336.2
  Top Layer w10: P2.3@6282,6418 P2.3@6285,6421 ; P2.3 P2.3@6285,6421 ; P2.3@6285,6430 P2.3@6285,6421 ; U1.28 7041.15,7177.15 P2.3@6285,6421
MSP_P2.4/RTCCLK: P2.4 U1.29 | length 1286.5
  Top Layer w10: P2.4@6388,6412 7060.83,7084.83 U1.29
MSP_P2.5: P2.5 U1.30 | length 1252.3
  Top Layer w10: P2.5@6478,6417 7080.52,7019.52 U1.30
MSP_P2.6/ACLK: P2.6 U1.31 | length 1219.6
  Top Layer w10: P2.6@6584,6414 7100.2,6930.2 U1.31
MSP_P2.7/DMAE0: P2.7 U1.32 | length 1194.1
  Top Layer w10: P2.7@6675,6410 7119.89,6854.89 U1.32
MSP_P3.0/UCA0CLK: P2.8 U1.33 | length 1148.2
  Top Layer w10: P2.8@6786,6418 7139.57,6771.57 U1.33
MSP_P3.1/UCB0SDA: P2.9 U1.34 | length 1115.6
  Top Layer w10: P2.9@6882,6419 7159.26,6696.26 U1.34
MSP_P3.2/UCB0SCL: P2.10 U1.35 | length 1089.5
  Top Layer w10: P2.10@6984,6411 7178.94,6605.94 U1.35
MSP_P3.3/UCA0STE: P2.11 U1.36 | length 1054.5
  Top Layer w10: P2.11@7081,6414 7198.63,6531.63 U1.36
MSP_P3.4/UCA0TXD: P2.14 U1.39 | length 1057.9
  Top Layer w10: U1.39 7257.69,6543.31 P2.14@7386,6415
MSP_P3.5/UCA0RXD: P2.15 U1.40 | length 1087.9
  Top Layer w10: U1.40 7277.37,6615.63 P2.15@7478,6415
MSP_P3.6/UCA1CLK: P2.16 U1.41 | length 1124.6
  Top Layer w10: U1.41 7297.06,6700.94 P2.16@7584,6414
MSP_P3.7/UCB1SDA: P2.17 U1.42 | length 1161.3
  Top Layer w10: U1.42 7316.74,6779.26 P2.17@7685,6411
MSP_P4.0/TB0.0: P2.18 U1.43 | length 1180.3
  Top Layer w10: U1.43 7336.43,6869.57 P2.18@7782,6424
MSP_P4.1/TB0.1: P2.19 U1.44 | length 1221.7
  Top Layer w10: U1.44 7356.11,6948.89 P2.19@7887,6418
MSP_P4.2/TB0.2: P2.20 U1.45 | length 1255.5
  Top Layer w10: U1.45 7375.8,7027.2 P2.20@7986,6417
MSP_P4.3/TB0.3: P2.21 U1.46 | length 1293.1
  Top Layer w10: U1.46 7395.48,7097.52 P2.21@8082,6411
MSP_P4.4/TB0.4: P2.22 U1.47 | length 1329.7
  Top Layer w10: U1.47 7415.17,7185.83 P2.22@8190,6411
MSP_P4.5/TB0.5: P2.23 U1.48 | length 1366.2
  Top Layer w10: U1.48 7434.85,7267.15 P2.23@8293,6409
MSP_P4.6/TB0.6: P2.24 U1.49 | length 1398.4
  Top Layer w10: U1.49 7454.54,7341.46 P2.24@8388,6408
MSP_P4.7/TB0CLK/SMCLK: P2.25 U1.50 | length 1426.6
  Top Layer w10: U1.50 P2.25@8482.99,6411
MSP_P5.0/VREF+: P1.9 U1.9 | length 1099.5
  Top Layer w10: P1.9@5970,8110 6514.75,8110 6828.01,7796.74 U1.9
MSP_P5.1/VREF-: P1.10 U1.10 | length 1076
  Top Layer w10: P1.10@5964,8007 6594,8007 6823.94,7777.06 U1.10 ; P1.10 P1.10@5970,8010
MSP_P5.2/XT2IN: P4.14 U1.89 | length 1030.9
  Top Layer w10: P4.14@7165,9025 7218.31,8971.68 U1.89
MSP_P5.3/XT2OUT: P4.15 U1.90 | length 1067.8
  Top Layer w10: P4.15@7061,9027 7198.63,8889.37 U1.90
MSP_P5.4/UCB1SCL: P3.1 U1.51 | length 1433.6
  Top Layer w10: U1.51 8487.01,6531 P3.1@8576,6531
MSP_P5.5/UCB1CLK: P3.2 U1.52 | length 1411.3
  Top Layer w10: U1.52 7716.54,7501.46 P3.2@8587,6631
MSP_P5.6/UCA1TXD: P3.3 U1.53 U3.5 | length 3730
  Top Layer w10: U1.53 7792.85,7521.15 P3.3@8589,6725 ; P3.3@8595,6730 9200,7335 10480,7335 10555,7410 10655.2,7410 U3.5
MSP_P5.7/UCA1RXD: P3.4 U1.54 U3.1 | length 3768.7
  Top Layer w10: U1.54 7870.17,7540.83 P3.4@8587,6824 ; P3.4@8590,6840 9310,7560 10225,7560 10268.66,7516.34 U3.1 U3.1@10623.66,7516.34
MSP_P6.0/A0: P4.22 U1.97 | length 1301.6
  Top Layer w10: P4.22@6366,9030 7060.83,8335.17 U1.97
MSP_P6.1/A1: P4.23 U1.98 | length 1347.6
  Top Layer w10: P4.23@6253,9036 7041.15,8247.85 U1.98 U1.98@7041.15,8014.85
MSP_P6.2/A2: P4.24 U1.99 | length 1366.4
  Top Layer w10: P4.24@6158,9025 7021.46,8161.54 U1.99
MSP_P6.3/A3: P4.25 U1.100 | length 1395.5
  Top Layer w10: P4.25@6061,9022 6061,8957.01 U1.100
MSP_P6.4/A4: P1.1 U1.1 | length 1344.6
  Top Layer w10: P1.1@5988.99,8905 U1.1
MSP_P6.5/A5: P1.2 U1.2 | length 1337.5
  Top Layer w10: P1.2@5967,8815 6014,8815 6894.46,7934.54 U1.2
MSP_P6.6/A6: P1.3 U1.3 | length 1300.7
  Top Layer w10: P1.3@5968,8709 6089,8709 6883.15,7914.85 U1.3
MSP_P6.7/A7: P1.4 U1.4 | length 1276.6
  Top Layer w10: P1.4 P1.4@5975,8610 ; P1.4@5968,8607 6157,8607 6868.83,7895.17 U1.4
MSP_P7.0/XIN: C7.2 Osc1.2 U1.13 | length 413.5
  Top Layer w10: Osc1.2@6638,7759 6669.29,7766.82 Osc1.2@6669.54,7766.89 ; Osc1.2@6644.12,7779.12 C7.2@6644.12,7866 ; Osc1.2@6668,7772 6730,7772 6784,7718 U1.13
MSP_P7.1/XOUT: C8.2 Osc1.1 U1.14 | length 351.4
  Top Layer w10: C8.2@6644,7602 Osc1.1@6644,7680 ; Osc1.1@6667.31,7698.31 U1.14 U1.14@6939.09,7699
MSP_P7.2: P3.5 U1.55 | length 1318.1
  Top Layer w10: U1.55 7948.48,7560.52 P3.5@8589,6920
MSP_P7.3/TA1.2: P3.6 U1.56 | length 1278.7
  Top Layer w10: U1.56 8036.8,7580.2 P3.6@8587,7030
MSP_P7.4/A12: P1.5 U1.5 | length 1232.5
  Top Layer w10: P1.5@5973,8517 6206,8517 6847.52,7875.48 U1.5
MSP_P7.5/A13: P1.6 U1.6 | length 1208.4
  Top Layer w10: P1.6@5960,8410 P1.6 ; P1.6@5968,8415 6282,8415 6841.2,7855.8 U1.6
MSP_P7.6/A14: P1.7 U1.7 | length 1174.6
  Top Layer w10: P1.7@5961,8309 6361,8309 6833.89,7836.11 U1.7
MSP_P7.7/A15: P1.8 U1.8 | length 1153.3
  Top Layer w10: P1.8@5952,8216 6431.37,8216 6830.95,7816.43 U1.8
MSP_P8.0/TA0.0: P3.7 U1.57 | length 1243.2
  Top Layer w10: U1.57 8112.11,7599.89 P3.7@8584,7128
MSP_P8.1/TA0.1: P3.8 U1.58 | length 1214.8
  Top Layer w10: U1.58 8194.43,7619.57 P3.8@8588,7226
MSP_P8.2/TA0.2: P3.9 U1.59 | length 1174
  Top Layer w10: U1.59 8275.74,7639.26 P3.9@8583,7332
MSP_P8.3/TA0.3: P3.10 U1.60 | length 1148.7
  Top Layer w10: U1.60 8354.06,7658.94 P3.10@8588,7425
MSP_P8.4/TA0.4: P3.11 U1.61 | length 1116.6
  Top Layer w10: U1.61 8438.37,7678.63 P3.11@8590,7527
MSP_P8.5/TA1.0: P3.15 U1.65 | length 1115.3
  Top Layer w10: U1.65 8400.37,7757.37 P3.15@8578,7935
MSP_P8.6/TA1.1: P3.16 U1.66 | length 1151.2
  Top Layer w10: U1.66 8324.06,7777.06 P3.16@8581,8034
MSP_P8.7: P3.17 U1.67 | length 1177.3
  Top Layer w10: U1.67 8250.74,7796.74 P3.17@8578,8124
MSP_P9.0: P3.18 U1.68 | length 1218.5
  Top Layer w10: U1.68 8168.43,7816.43 P3.18@8583,8231
MSP_P9.1: P3.19 U1.69 | length 1246.4
  Top Layer w10: U1.69 8077.11,7836.11 P3.19@8576,8335
MSP_P9.2: P3.20 U1.70 | length 1283.9
  Top Layer w10: U1.70 8003.8,7855.8 P3.20@8581,8433
MSP_P9.3: P3.21 U1.71 | length 1315.9
  Top Layer w10: U1.71 7926.48,7875.48 P3.21@8581,8530
MSP_P9.4/UCA2TXD: D6.2 P3.22 U1.72 U5.3 | length 3560.3
  Top Layer w10: U1.72 7847.17,7895.17 P3.22@8586,8634 ; D6.2@9705,9320 v1@9705,9500
  Bottom Layer w10: P3.22 8825,8630 9705,9510 U5.3@10245,9510
  other v1: 9705,9505
MSP_P9.5/UCA2RXD: D5.2 P3.23 U1.73 U5.2 | length 3677.7
  Top Layer w10: U1.73 7766.85,7914.85 P3.23@8578,8726 ; D5.2@9546.5,9302.8 v1@9546.5,9591.5
  Bottom Layer w10: P3.23@8590,8730 8705,8730 9564.92,9589.92 U5.2
  other v1: 9550,9585
MSP_P9.6: P3.24 U1.74 | length 1418.2
  Top Layer w10: U1.74 7679.54,7934.54 P3.24@8581,8836
MSP_P9.7: P3.25 U1.75 | length 1455.2
  Top Layer w10: U1.75 8515.01,8933 P3.25@8586,8933
MSP_P10.0: P4.1 U1.76 | length 1404
  Top Layer w10: U1.76 P4.1@8467,9009.01
MSP_P10.1: P4.2 U1.77 | length 1400.9
  Top Layer w10: U1.77 7454.54,8109.54 P4.2@8375,9030 ; P4.2@8360.86,9025.86 P4.2
MSP_P10.2: P4.3 U1.78 | length 1359.8
  Top Layer w10: U1.78 7434.85,8187.85 P4.3@8275,9028
MSP_P10.3: P4.4 U1.79 | length 1317.4
  Top Layer w10: U1.79 7415.17,8273.17 P4.4@8165,9023
MSP_P10.4/UCA3TXD: P4.5 U1.80 U2.11 | length 2002.6
  Top Layer w10: U1.80 7395.48,8358.48 P4.5@8065,9028 ; U2.11 7600,9495 P4.5
MSP_P10.5/UCA3RXD: P4.6 U1.81 U2.12 | length 2038.2
  Top Layer w10: U1.81 7375.8,8439.8 P4.6@7970,9034 ; U2.12 v1(7660,9545)
  Bottom Layer w10: v1@7655,9555 7660,9550 v1(7660,9545) 7965,9240 P4.6 P4.6@7965,9025
MSP_P10.6: P4.7 U1.82 | length 1226.1
  Top Layer w10: U1.82 7356.11,8524.11 P4.7@7864,9032
MSP_P10.7: P4.8 U1.83 | length 1196.5
  Top Layer w10: U1.83 7336.43,8602.43 P4.8@7768,9034
MSP_P11.0/ACLK: P4.9 U1.84 | length 1164.5
  Top Layer w10: U1.84 7316.74,8679.74 P4.9@7671,9034
MSP_P11.1/MCLK: P4.10 U1.85 | length 1124.2
  Top Layer w10: U1.85 7297.06,8760.06 P4.10@7566,9029
MSP_P11.2/SMCLK: P4.11 U1.86 | length 1091.5
  Top Layer w10: U1.86 7277.37,8842.37 P4.11
MSP_PJ.0/TDO: P4.17 P5.1 U1.92 | length 2292.4
  Top Layer w10: P5.1@6276,9744 P5.1 6330,9690 6670,9690 6744,9616 6744,9151 P4.17 ; P4.17@6866,9030 7159.26,8736.74 U1.92
MSP_PJ.1/TDI/TCLK: P4.18 P5.3 U1.93 | length 2121.3
  Top Layer w10: P5.3@6293,9633 6333,9593 6600,9593 6704,9489 6704,9091 P4.18 ; P4.18@6764,9027 7139.57,8651.43 U1.93
MSP_PJ.2/TMS: P4.19 P5.5 U1.94 | length 1937
  Top Layer w10: P5.5@6281,9541 6329,9493 6441,9493 6665,9269 P4.19 ; P4.19@6667,9030 7119.89,8577.11 U1.94
MSP_PJ.3/TCK: P4.20 P5.7 U1.95 | length 1771.4
  Top Layer w10: P5.7@6285,9445 6331,9399 6331,9264 P4.20 ; P4.20@6565,9035 7100.2,8499.8 U1.95
MSP_R\S\T\: C14.2 P4.21 P5.8 R1.1 S1.1 U1.96 | length 2615.5
  Top Layer w10: R1.1@5740,9726 R1.1 ; S1.1 R1.1 ; C14.2 6100.88,9484 6312,9484 P5.8@6358,9438 ; C14.2@5848.88,9735.12 R1.1 ; P4.21@6466,9030 7080.52,8415.48 U1.96
  Bottom Layer w10: P5.8@6385,9443 6465,9363 P4.21
MSP_TEST: P4.16 P5.6 U1.91 | length 1898.5
  Top Layer w10: P4.16@6964,9030 7178.94,8815.06 U1.91
  Bottom Layer w10: P5.6@6381,9541 6454,9541 P4.16
MSP_VCORE: C6.1 U1.62 | length 261.1
  Top Layer w10: v1@7351,7661 7443,7661 7480.31,7698.31 U1.62 U1.62@7536.54,7698
  Bottom Layer w10: v1(7356,7663) C6.1@7416,7663
NetC9_1: C9.1 U2.3 | length 335
  Top Layer w10: C9.1 6999.88,9799.88 ; 7000,9800 7155,9645 U2.3
NetC9_2: C9.2 U2.1 | length 329.2
  Top Layer w10: C9.2@6925,9910 7020.87,9910 U2.1
NetC10_1: C10.1 U2.2 | length 470.9
  Top Layer w10: U2.2@7165,9695 U2.2 7300,9695 7464,9859 C10.1@7568,9859
NetC12_1: C12.1 U2.5 | length 246.6
  Top Layer w10: 6960,9595 7010,9545 U2.5
NetC12_2: C12.2 U2.4 | length 285.2
  Top Layer w10: C12.2@6940,9690 7035,9595 U2.4
NetC13_1: C13.1 U2.6 | length 270.9
  Top Layer w10: C13.1@6915,9495 U2.6
NetC17_2: C17.2 J2.1 U4.1 | length 772.4
  Top Layer w10: U4.1 U4.1@11214.45,7304.45 ; U4.1@11220,7285 11465,7285 11525,7225 11525,7155 11485,7115 11385,7115 11345,7075 J2.1 C17.2@11225,7060
NetD1_1: D1.1 R2.1 | length 131.5
  Top Layer w10: D1.1@11280,8171.5 R2.1@11411.5,8171.5
NetD2_1: D2.1 R5.2 | length 151.5
  Top Layer w10: D2.1@11280,7771.5 R5.2@11431.5,7771.5
NetD3_1: D3.1 R6.2 | length 141.5
  Top Layer w10: D3.1@11280,7971.5 R6.2@11421.5,7971.5
NetD4_1: D4.1 R7.1 | length 126.5
  Top Layer w10: D4.1 R7.1@11426.5,8371.5
NetD5_1: D5.1 R8.2 | length 124.9
  Top Layer w10: R8.2 D5.1@9535,9165
NetD6_1: D6.1 R9.2 | length 124.9
  Top Layer w10: R9.2 D6.1@9705,9160
NetJ1_1: J1.1 J1.4 J1.6 | length 467.5
  Top Layer w10: J1.1@8436.89,9493.89 J1.1 J1.1@8445,9493.19
  Bottom Layer w10: J1.1 8436.89,9551.89 J1.6@8479,9594 ; J1.6@8490,9598 8546,9542 8707.13,9542 J1.4
NetJ1_7: J1.7 J1.8 | length 101.7
  Bottom Layer w10: J1.7 8603.36,9594 J1.8@8701,9594
NetR7_2: R7.2 U5.13 | length 914.4
  Top Layer w10: U5.13 11530,8702.48 R7.2@11530,8375
R\E\S\E\T\: R3.2 R4.1 U3.19 | length 596.4
  Top Layer w10: R4.1 R3.2 R3.2@10730.12,7759.88 ; R4.1@10740,7640 10729,7629 10729,7571 10793,7507 10793,7342 10848.98,7286.02 U3.19 U3.19@10931.85,7285
R\T\S\: P6.2 U3.3 | length 545.5
  Top Layer w10: P6.2 10160,7390 10236,7466 ; 10236.09,7465 10520,7465 ; 10520.91,7465 U3.3@10670,7465
RS232_RX: J1.3 U2.13 | length 1337
  Top Layer w10: U2.13 7696,9595 8022,9269 8442,9269 J1.3@8657,9484
RS232_TX: J1.2 U2.14 | length 1196.4
  Top Layer w10: U2.14 7690,9645 8000,9335 8400,9335 J1.2@8550,9485
USB_RX: D2.2 U3.22 | length 510.1
  Top Layer w10: U3.22@10934.03,7366 U3.22 10933.03,7365 10968,7365 11155,7552 D2.2@11155,7755
USB_SHIELD: J2.5 J2.6 | length 465
  Bottom Layer w10: 11535,6885 J2.6
USB_TX: D3.2 U3.23 | length 698.8
  Top Layer w10: U3.23 10968.76,7388.39 11085,7504.62 11085,7895 D3.2@11160,7970
USBD_N: J2.2 U3.16 | length 521.8
  Top Layer w10: U3.16 10895.85,7209.25 10878.49,7191.89 10878.49,7175.44 10890.26,7163.66 11318.96,7163.66 J2.2@11319.3,7164
USBD_P: J2.3 U3.15 | length 537.9
  Top Layer w10: U3.15 11310.68,7183.66 11328.02,7201 11383,7201 J2.3@11423,7161 ; J2.3@11402.98,7160 J2.3
VCC5V: C10.2 C11.1 C15.1 C16.1 R3.1 U2.16 U3.20 U4.2 | length 5941.3
  Top Layer w10: v1@7449,9745 U2.16 7573,9745 C10.2@7691,9863 ; C10.2@7679,9865 9315,9865 9415,9765 9415,8835 10495,7755 R3.1 R3.1@10620,7755 ; U3.20@10934.21,7315 U3.20 v1@11061.61,7311.61 ; v1@11075,7330 11125,7280 U4.2
  Bottom Layer w10: C11.1@7369,9658 v1(7451,9740) ; v1@10500,7749 10500,7619 10723,7396 10999,7396 v1(11070,7325) 11073,7325 C16.1@11160,7412
  other v1: 10500,7750
VCCTARGET: P5.4 P7.2 | length 241
  Top Layer w10: P7.2 P7.2@6621,9640
  Bottom Layer w10: P5.4 P7.2
VCCTOOL: P5.2 P7.1 | length 249
  Bottom Layer w10: P5.2@6371,9740 P5.2 P7.1
pads on no net: J1.9 Osc1.M1 P1.11 P1.12 P1.13 P1.14 P1.15 P1.16 P2.12 P2.13 P3.12 P3.13 P3.14 P4.12 P4.13 P5.10 U2.7 U2.8 U2.9 U2.10 U3.6 U3.8 U3.9 U3.10 U3.12 U3.13 U3.14 U3.24 U3.27 U3.28 U5.4 U5.5 U5.6 U5.7 U5.8 U5.9 U5.11 U5.12 U5.14 U5.15 U5.16 U5.17 U5.18 U5.19 U5.20
copper on no net:
  other v2: 3670,6175 11460,6180 11480,10000 3730,10005

## Polygon pours and split planes (outlines as drawn)
MSP_AVSS on Bottom Layer "GND-Bottom Layer" (solid, remove dead copper, shelved, pour order 1002): 3275,10315 11670,10315 11680,10305 11670,10295 11670,5875 3295,5875 3285,5865
no net on Top Layer "VCC Top- Layer" (solid, remove dead copper, shelved, pour order 1003): 3275,10320 3280,10315 11670,10315 11670,5865 11665,5860 3275,5860 3275,10320
MSP_AVCC on Top Layer "VCC Top Layer" (solid, remove dead copper, pour order 1000): 3475,10220 11705,10230 11715,5945 3455,5950
MSP_AVSS on Bottom Layer "GND Bottom Layer" (solid, remove dead copper, pour order 1001): 3475,10210 11705,10220 11705,5960 3465,5960

## Other copper
Top Layer:
  pour cut-out: 9825,10210 9825,8580 11715,8580 11705,8590 11705,10215
Bottom Layer:
  pour cut-out: 9825,10210 11700,10210 11705,10215 11705,8580 9825,8580 9820,8575

## Silkscreen, mask and mechanical layers (free items; w line width, h text height)
Top Overlay:
  text "RS232 Interface" at 6870,10050 h60
  text "JTAG Port" at 5566,9390 h60
  text "Bruce Chen" at 4180,8825 h60 r90
  text "Special Thanks" at 4055,8815 h60 r90
  text "XBee Interface" at 10260,8685 h60
  text "USB Interface" at 10300,6790 h60
  text "Arielle Blum" at 4640,6645 h60 r90
  text "Nick Bertrand" at 4750,6645 h60 r90
  text "Mike Mozingo" at 4840,6645 h60 r90
  text "Armeen Taeb" at 4945,6645 h60 r90
  text "Khashi Xiong" at 5035,6645 h60 r90
  text "eyeCU" at 3965,6440 h400 r90
  text "MSP430 Board [Rev. 1]" at 4260,6420 h100 r90
  text "Capstone 2012" at 4360,6420 h60 r90
  text "Team Members" at 4495,6420 h60 r90
  text "MSP430F5438A" at 6040,6145 h60

## Text inside footprints (layer, text, board x,y; h text height)
J1: Top Overlay "5" at 8853.43,9349.06 h59.06; Top Overlay "9" at 8798.9,9719.13 h59.06; Top Overlay "6" at 8471.73,9719.13 h59.06
P5: Top Overlay "2" at 6335,9855 h50 r270; Top Overlay "1" at 6260,9835 h50 r270